# Altium PCB Hall_module.PcbDoc
Units mm, origin at the board's own origin, x right, y up, seen from the top; angles counter-clockwise.
Board outline 45.09 x 19.05 mm, 2 copper layers (Top Layer, Bottom Layer); 17 components, 9 nets, 43 pads, 30 vias.
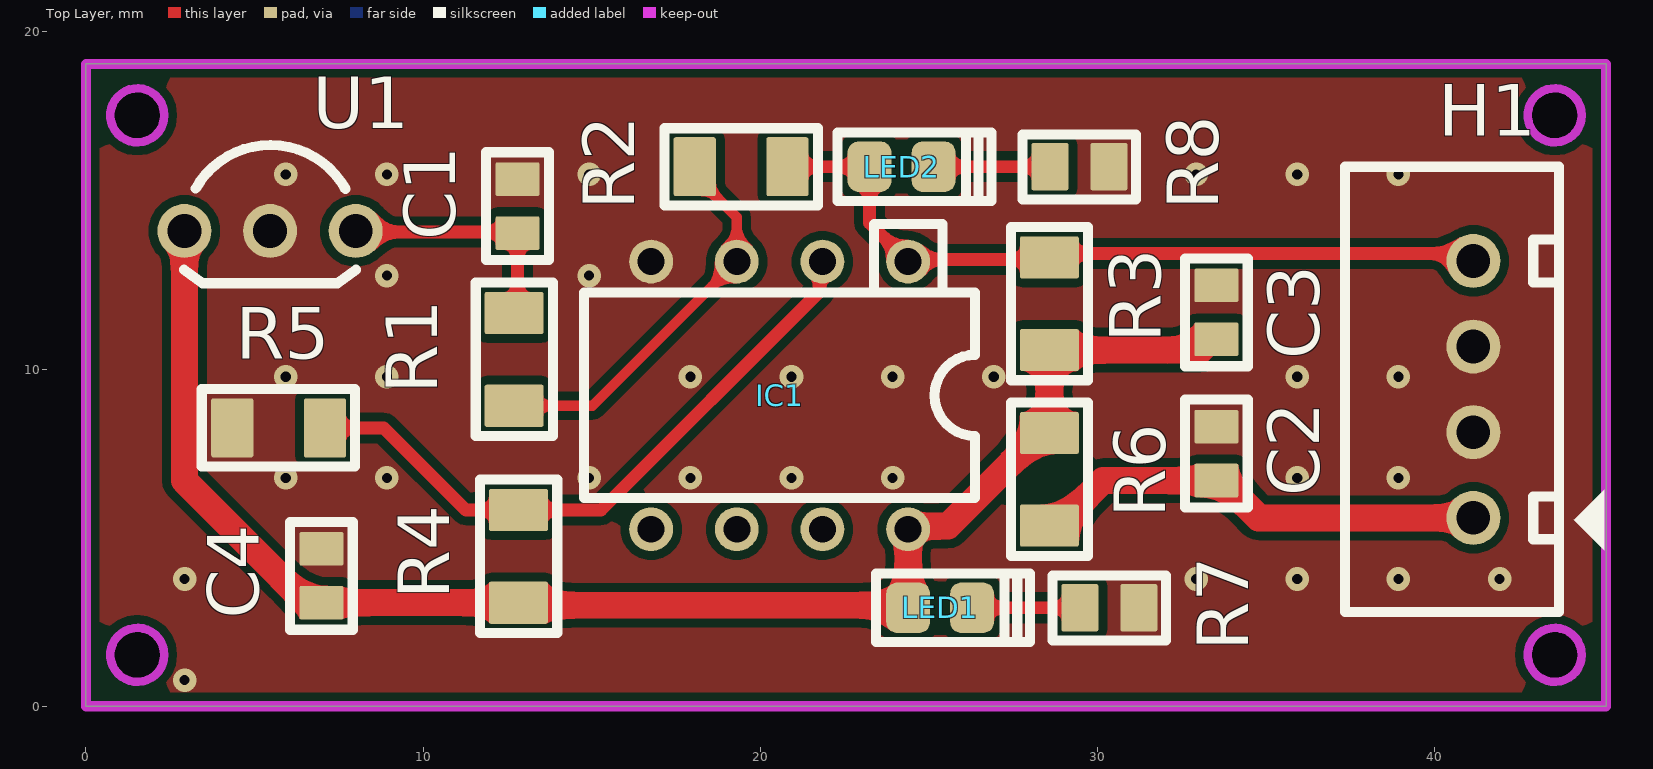
[diagram p0: Top Layer view]
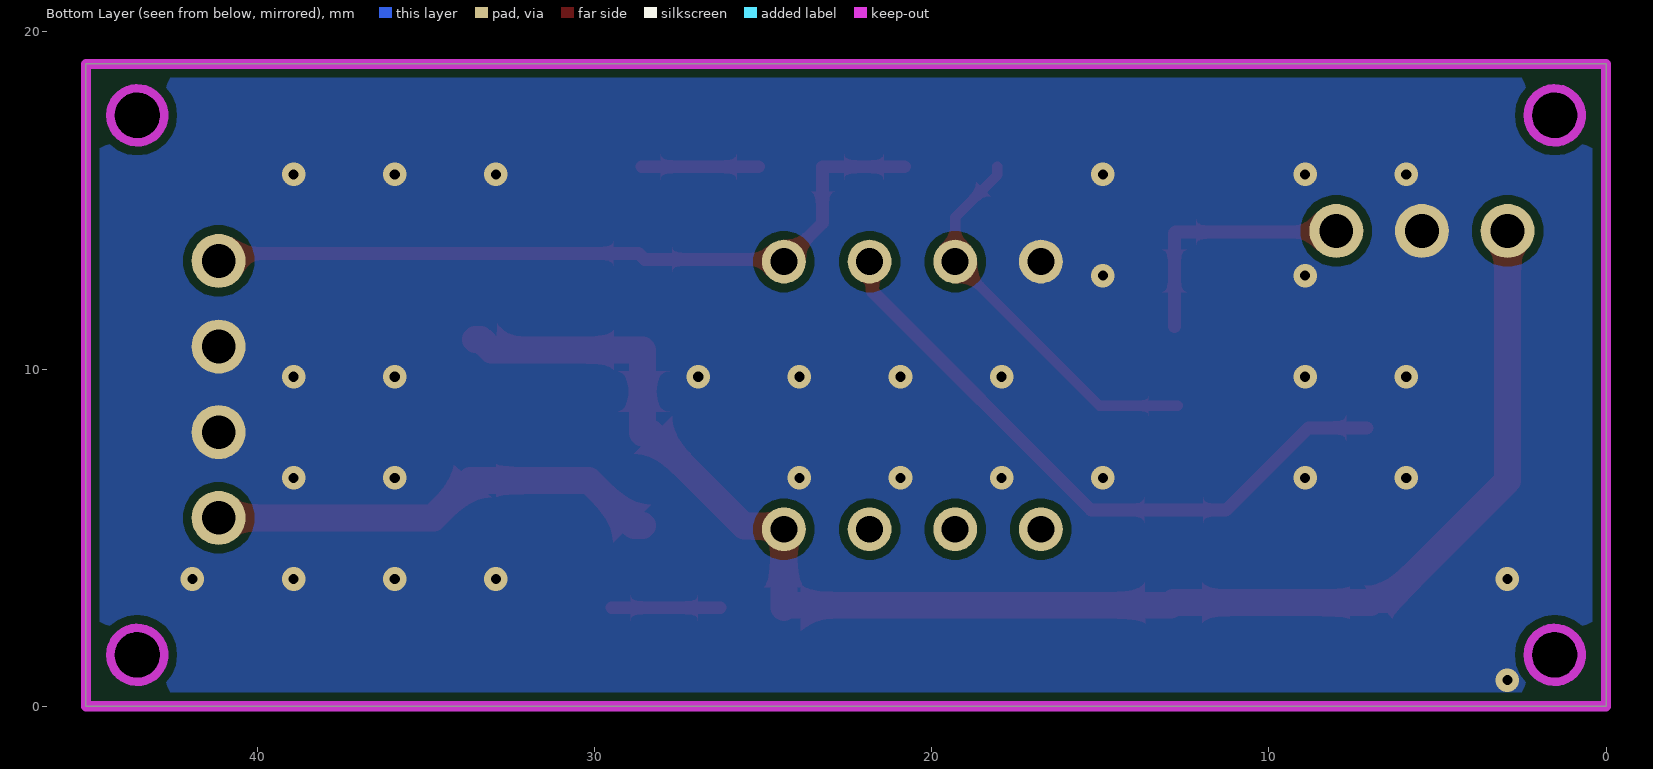
[diagram p1: Bottom Layer view, seen from below]
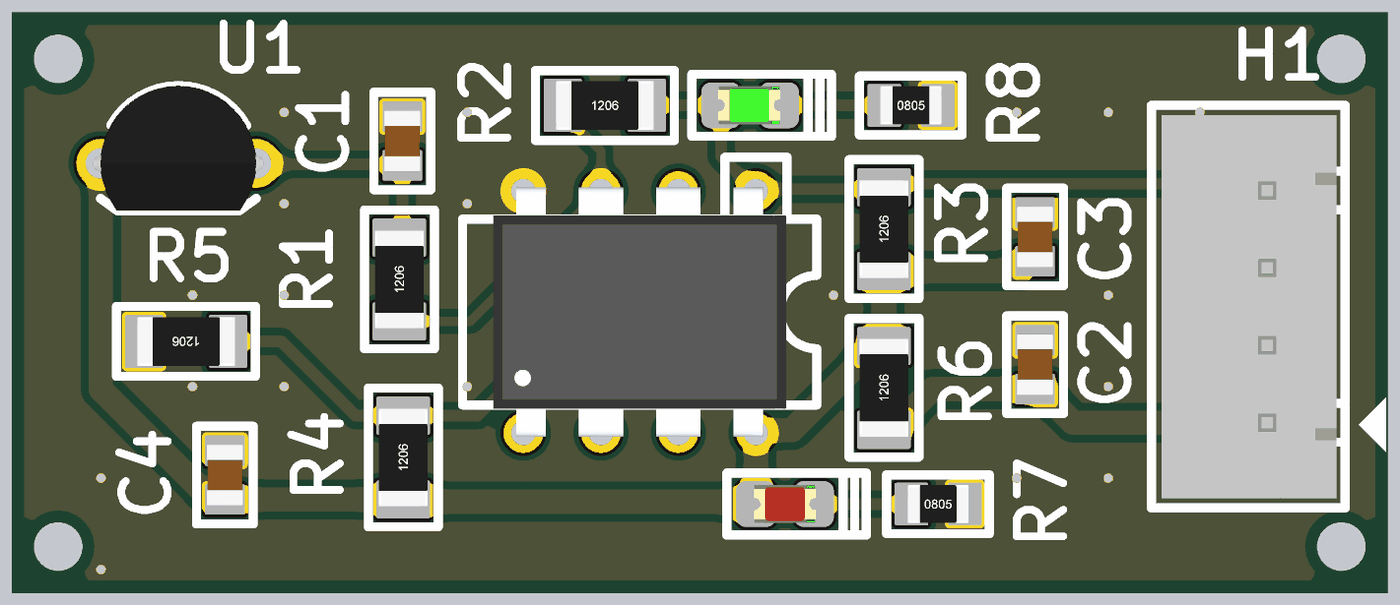
[diagram p2: 3D render of the assembled board from above, using the file's embedded part models]

## Layer stack, top to bottom
Top Solder: solder mask 0.0102, Solder Resist, Dk 3.5
Top Layer: signal copper 0.0348
Dielectric 1: dielectric 0.32, FR-4, Dk 4.8
Bottom Layer: signal copper 0.0348
Bottom Solder: solder mask 0.0102, Solder Resist, Dk 3.5

## Board outline
45.085,0 45.085,19.05 0,19.05 0,0
cut-out: 42.761,17.526 ccw(c43.561,17.526) 43.561,16.726 ccw(c43.561,17.526) 44.361,17.526 ccw(c43.561,17.526) 43.561,18.326 ccw(c43.561,17.526)
cut-out: 0.724,1.524 ccw(c1.524,1.524) 1.524,0.724 ccw(c1.524,1.524) 2.324,1.524 ccw(c1.524,1.524) 1.524,2.324 ccw(c1.524,1.524)
cut-out: 42.761,1.524 ccw(c43.561,1.524) 43.561,0.724 ccw(c43.561,1.524) 44.361,1.524 ccw(c43.561,1.524) 43.561,2.324 ccw(c43.561,1.524)
cut-out: 0.724,17.526 ccw(c1.524,17.526) 1.524,16.726 ccw(c1.524,17.526) 2.324,17.526 ccw(c1.524,17.526) 1.524,18.326 ccw(c1.524,17.526)

## Design rules (kind name [scope] priority, off if disabled: settings)
Clearance [All] p1: gap=0.254 ignorepadtopadclearanceinfootprint=FALSE
MaxMinImpedance [All] p1: minimum=1.000 maximum=50.00
PolygonConnect PolygonConnect_2 [All vs IsNamedPolygon('NONET_L-01_P-001') Or IsNamedPolygon('NONET_L-01_P-001')] p1: connectstyle=Direct reliefconductorwidth=0.254 reliefentries=4 polygonreliefangle="90 Angle" airgapwidth=0.254
PolygonConnect PolygonConnect_1 [All vs IsNamedPolygon('NONET_L-01_P-001') Or IsNamedPolygon('NONET_L-01_P-001')] p2: connectstyle=Direct reliefconductorwidth=0.254 reliefentries=4 polygonreliefangle="90 Angle" airgapwidth=0.254
PolygonConnect [All] p3: connectstyle=Relief reliefconductorwidth=0.254 reliefentries=4 polygonreliefangle="90 Angle" airgapwidth=0.254
RoutingVias [All] p1: holewidth=0.4 width=0.7 viastyle="Through Hole" minholewidth=0.3 minwidth=0.4 maxholewidth=0.6 maxwidth=1.1
SolderMaskExpansion [All] p1: expansion=0.102 istentingtop=FALSE
SupplyNets "Schematic Supply Nets_2" [InNet('VCC')] p1: voltage=0.000
SupplyNets "Schematic Supply Nets_1" [InNet('GND')] p2: voltage=0.000
SupplyNets "Schematic Supply Nets" [InNet('+5')] p3: voltage=0.000
Width [All] p1: maxlimit=0.8 minlimit=0.3 preferedwidth=0.3
30 further rules are at their usual default settings.

## Classes and differential pairs
component class Hall_module: C3 C4 H1 IC1 LED1 LED2 R1 R2 R3 R4 R8 U1

## Components (designator, comment, footprint, x,y, rotation, side; value= is the part's Value field where it differs from the comment)
C1 "100nF/50V/C0805/10%" CAP_CERA_C2012(CC0805INCH) 12.8,14.832 r270 top value="100pF, 2012"
C2 "10uF/16V/C0805/10%" CAP_CERA_C2012(CC0805INCH) 33.528,7.493 r270 top value="100pF, 2012"
C3 "0.1uF/50V/C0805/10%" CAP_CERA_C2012(CC0805INCH) 33.528,11.684 r90 top value="100pF, 2012"
C4 "0.1uF/50V/C0805/10%" CAP_CERA_C2012(CC0805INCH) 6.985,3.87 r90 top value="100pF, 2012"
H1 "5VDC IN" XH2.54M-4 41.148,5.588 r90 top
IC1 "LM393" U_LM393_DIP8_THT 20.574,9.219 r180 top value=LM358
LED1 "LED-0805RVC" "LED 0805R" 25.334,2.921 r0 top value=Red
LED2 "LED-0805GVC" "LED 0805G" 24.191,16.002 r0 top value=Green
R1 "1K/R1206/1%" "RES 1206 SMD" 12.7,10.287 r90 top
R2 "22K/R1206/1%" "RES 1206 SMD" 19.431,16.002 r0 top
R3 "10K/R1206/1%" "RES 1206 SMD" 28.575,11.938 r90 top
R4 "1K/R1206/1%" "RES 1206 SMD" 12.827,4.445 r90 top
R5 "1K/R1206/1%" "RES 1206 SMD" 5.715,8.255 r180 top
R6 "10K/R1206/1%" "Res 1206 SMD" 28.575,6.731 r90 top
R7 "220R/R0805/1%" "RES 0805 SMD" 30.353,2.921 r0 top
R8 "220R/R0805/1%" "RES 0805 SMD" 29.464,16.002 r0 top
U1 "3144E" U_3144E 5.461,14.097 r0 top

## Footprints (in the part's own frame and the unit in brackets; to place one, negate y for a bottom-side part, rotate by r counter-clockwise, add the part's x,y. Pads: shape width x height; smd on the part's side, far side on the other; paste and mask are expansions set on the pad)
CAP_CERA_C2012(CC0805INCH) [mm] "Chip Capacitor, 2-Leads, Body 2.0x1.3mm, IPC Medium Density"
  rrect10% 1x1.3 smd: 1(-0.8,0) 2(0.8,0)
  silkscreen extent -1.6,-0.93 1.6,0.93, body extent -1,-0.6 1,0.6, height 0.95
"LED 0805G" [mm]
  rrect50% 1.3x1.5 smd: 1(-0.95,0) 2(0.95,0)
  silkscreen extent -1.91,-1.02 2.67,1.02, body extent -1.04,-0.62 0.98,0.62, height 1.1
"LED 0805R" [mm]
  rrect50% 1.3x1.5 smd: 1(-0.95,0) 2(0.95,0)
  silkscreen extent -1.91,-1.02 2.67,1.02, body extent -1.01,-0.63 1.01,0.62, height 1.1
"RES 0805 SMD" [mm]
  rrect10% 1.1x1.4 smd mask+0.1: 1(-0.875,0) 2(0.875,0)
  silkscreen extent -1.69,-0.97 1.67,0.96, body extent -1,-0.62 1,0.63, height 0.62
"RES 1206 SMD" [mm]
  rrect10% 1.25x1.75 smd mask+0.1: 1(-1.375,0) 2(1.375,0)
  silkscreen extent -2.27,-1.15 2.28,1.14, body extent -1.6,-0.8 1.6,0.8, height 0.65
"Res 1206 SMD" [mm] "Reflow Soldering"
  rrect10% 1.25x1.75 smd mask+0.1: 1(-1.375,0) 2(1.375,0)
  silkscreen extent -2.27,-1.15 2.28,1.14, body extent -1.6,-0.8 1.6,0.8, height 0.65
U_3144E [mm]
  round 1.6 hole 1 mask+0.1: 1(-2.54,0) 2(0,0) 3(2.54,0)
  silkscreen extent -2.55,-1.55 2.55,2.55, body extent -2.79,-1.55 2.79,2.55, height 8.6
U_LM393_DIP8_THT [mm]
  round 1.3 hole 0.8 mask+0.1: 1(-3.81,-3.97) 2(-1.27,-3.97) 3(1.27,-3.97) 4(3.81,-3.97) 5(3.81,3.97) 6(1.27,3.97) 7(-1.27,3.97) 8(-3.81,3.97)
  silkscreen extent -5.8,-5.08 5.8,3.05, body extent -4.79,-4.1 4.79,4.1, height 5.08
XH2.54M-4 [mm]
  round 1.6 hole 1: 1(0,0) 2(2.54,0) 3(5.08,0) 4(7.62,0)
  silkscreen extent -2.79,-3.89 10.41,3.81, body extent -2.48,-2.26 10.1,3.48, height 6.91

## Part data
C1 C2 C3 C4: library part "CAP CERA 0805", "CERAMIC CAP 0805"
H1: library part "Header 4P 2.54 Duc Thang", "Cắm", Chung_Loai=Cắm, Don_Vi=Con, Ma_Hang=MH001285, Ten_Linh_Kien="Header 4P XH2.54-4P Đực Thẳng"
IC1: library part LM358, "Low-Power Dual Operational Amplifier"
LED1: "LED Red 2mA 1.8V 0805", ComponentLink1Description=Datasheet, ComponentLink1URL="D:\Dropbox\Datasheets\Opto and Illumination\LEDs\SMD LED.pdf", Unit Price=0.0476
LED2: "LED Green 2mA 3V 0805", ComponentLink1Description=Datasheet, ComponentLink1URL="D:\Dropbox\Datasheets\Opto and Illumination\LEDs\SMD LED.pdf", Unit Price=0.0476
R1 R2 R3 R4 R5 R6: library part RES-1206, "RES SMD 10K OHM 1% 1206", Manufacturer=Yageo, Manufacturer Part Number=RC1206FR-075R1L, Operating Temperature="-55°C ~ 155°C", Package / Case="1206 (3216 Metric)", Power (Watts)="0.25W, 1/4W", Resistance (Ohms)=5.1, Supplier Device Package=1206, Supplier Part Number 1=311-5.10FRCT-ND, Temperature Coefficient=±200ppm/°C, Tolerance=±1%, Category=Resistors, ComponentLink1Description=http://www.yageo.com/documents/recent/PYu-RC_Group_51_RoHS_L_7.pdf, ComponentLink1URL=http://www.yageo.com/documents/recent/PYu-RC_Group_51_RoHS_L_7.pdf, Composition="Thick Film", Failure Rate=-, Features="Moisture Resistant", Height - Seated (Max)="0.026\" (0.65mm)", Packaging="Cut Tape (CT)", Part Status=Active, Pricing 1="1=0.1, 10=0.051, 100=0.0207, 1000=0.0093, 2500=0.00807 (USD)", RoHS="RoHS Compliant", Size / Dimension="0.122\" L x 0.063\" W (3.10mm x 1.60mm)", Stock 1=96701, Supplier 1=Digi-Key
R7 R8: library part 34.8K/R0805/1%, "Thick Film Resistors - SMD 34.8K OHM 1% 0805", Case Code (Imperial)=0603, Case Code (Metric)=1608, Manufacturer=Yageo, Manufacturer Part Number=RC0603FR-0734K8L, Max Operating Temperature=155°C, Min Operating Temperature=-55°C, Power Rating=100mW, Resistance=34.8kR, Supplier Part Number 1=311-34.8KHRCT-ND, Temperature Coefficient=100ppm/°C, Tolerance=1%, Voltage Rating=50V, Case/Package=0603, Composition="Thick Film", Depth=0.8mm, Height=0.45mm, Lead Free="Lead Free", Length=1.6mm, Military Standard=Not, Packaging="Tape and Reel", Pricing 1="1=0.1, 10=0.026, 100=0.0107, 1000=0.0048, 2500=0.0042 (USD)", Stock 1=82861, Supplier 1=Digi-Key, Termination=SMD/SMT, Voltage Rating (DC)=50V, Width=0.8mm
U1: library part SS541AT, "Digital hall sensor switch Open Collector Hall Effect", Package="SOT-89 Honeywell", Check_prices=https://www.snapeda.com/parts/SS541AT/Honeywell+Sensing+and+Control/view-part/?ref=eda, MF="Honeywell Sensing", MP=SS541AT, SnapEDA_Link=https://www.snapeda.com/parts/SS541AT/Honeywell+Sensing+and+Control/view-part/?ref=snap

## Via types
v1: diameter 0.7, hole 0.3, Top Layer to Bottom Layer, tented both sides, 30 vias

## Nets (pads, with @x,y where several pads share a name; then routed paths per layer and width w, separated by ;. In a path a pad name is that pad's centre, name@x,y a point inside that pad or via, vN(x,y) a via of type N, cw(c..) or ccw(c..) an arc to the next point about the centre after c; other vN are vias at no path point)
3144E_IN: H1.4 IC1.1 LED2.1 R2.2 R3.2 | length 22.7
  Top Layer w0.381: R2.2 LED2.1 23.241,14.332 IC1.1 24.446,13.251 28.513,13.251 28.691,13.429 40.927,13.429 H1.4
3144E_OUT: C1.2 R1.2 U1.3 | length 7.6
  Top Layer w0.381: U1.3 8.033,14.065 12.768,14.065 C1.2 R1.2@12.8,11.254
+5: C3.1 C4.1 IC1.8 LED1.1 R3.1 R4.1 R6.2 U1.1 | length 45.7
  Top Layer w0.8: U1.1 2.921,6.688 6.439,3.17 6.885,3.17 C4.1 R4.1 12.902,2.996 24.309,2.996 LED1.1 IC1.8 24.48,5.345 25.564,5.345 28.325,8.106 R6.2 R3.1 33.057,10.563 33.378,10.884 C3.1
GND: C1.1 C2.1 C3.2 C4.2 H1.2 H1.3 IC1.4 R5.2 R7.2 R8.2 U1.2
  other v1: 2.926,0.773 2.926,3.773 32.926,3.773 35.926,3.773 38.926,3.773 41.926,3.773 5.926,6.773 8.926,6.773 14.926,6.773 17.926,6.773 20.926,6.773 23.926,6.773 35.926,6.773 38.926,6.773 5.926,9.773 8.926,9.773 17.926,9.773 20.926,9.773 23.926,9.773 26.926,9.773 35.926,9.773 38.926,9.773 8.926,12.773 14.926,12.773 5.926,15.773 8.926,15.773 14.926,15.773 32.926,15.773 35.926,15.773 38.926,15.773
NetIC1_2: IC1.2 R4.2 R5.1 | length 19.3
  Top Layer w0.381: R5.1 8.833,8.255 11.268,5.82 R4.2 15.275,5.82 21.761,12.307 21.761,13.107 IC1.2
NetIC1_3: IC1.3 R1.1 R2.1 | length 11.7
  Top Layer w0.3: R1.1 15.027,8.912 IC1.3 19.304,14.504 18.056,15.752 R2.1
NetLED1_2: LED1.2 R7.1 | length 3.2
  Top Layer w0.381: LED1.2 R7.1
NetLED2_2: LED2.2 R8.1 | length 3.4
  Top Layer w0.381: LED2.2 R8.1
VCC: C2.2 H1.1 R6.1 | length 13.4
  Top Layer w0.8: R6.1 28.825,5.356 30.162,6.693 C2.2 ; C2.2@33.678,6.693 34.783,5.588 H1.1
pads on no net: IC1.5 IC1.6 IC1.7

## Polygon pours and split planes (outlines as drawn)
GND on Bottom Layer "NONET_L-01_P-001" (solid, pour order 2): -0.144,19.109 44.941,19.109 44.941,0.059 -0.144,0.059
GND on Top Layer "NONET_L-01_P-001" (solid, pour order 0): 0,19.05 45.085,19.05 45.085,0 0,0

## Keep-outs
Keep-Out Layer:
  circle w0.254: c43.561,17.526 r0.8
  circle w0.254: c1.524,1.524 r0.8
  circle w0.254: c43.561,1.524 r0.8
  circle w0.254: c1.524,17.526 r0.8
  lines w0.3: 0,0 0,19.05 45.085,19.05 45.085,0 0,0

## Dimensions
45.085,0 to 45.085,19.05 on Mechanical 2
0,19.05 to 45.085,19.05 on Mechanical 2

## Text inside footprints (layer, text, board x,y; h text height)
H1: Mechanical 2 "4" at 41.479,12.877 h0.75 r90; Mechanical 2 "1" at 41.458,5.473 h0.75 r90
IC1: Mechanical 2 "8" at 24.624,7.07 h0.75 r180; Mechanical 2 "5" at 17.024,7.07 h0.75 r180; Mechanical 2 "4" at 17.024,12.069 h0.75 r180; Mechanical 2 "1" at 24.499,12.069 h0.75 r180
U1: Mechanical 2 "3" at 7.811,13.697 h0.75